# EAGLE board mag_encoder_Rev3_single_sided_4-up (EAGLE 7.5.0)
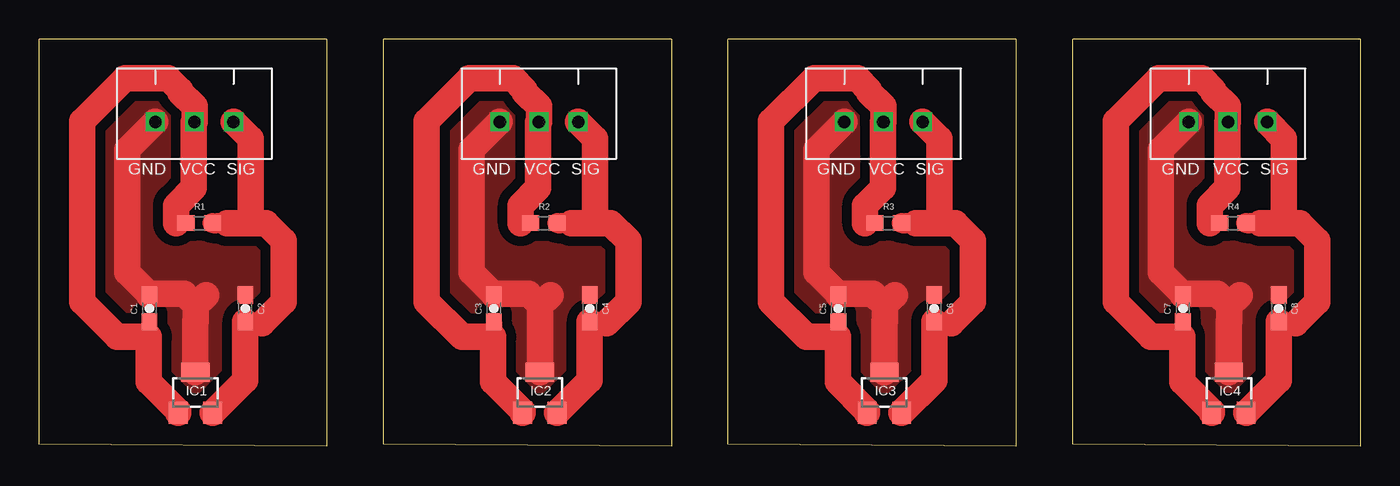
[diagram p0: board, top side]

Size 84.38 x 26 mm. Coordinates in mm from the lower left corner, seen from the top.
Outline: 0,0.12 0,26 18.38,26 18.38,0 0,0.12
Outline: 22,0.12 22,26 40.38,26 40.38,0 22,0.12
Outline: 44,0.12 44,26 62.38,26 62.38,0 44,0.12
Outline: 66,0.12 66,26 84.38,26 84.38,0 66,0.12
Copper layers 1: Top 0.0356mm
Design rules "LawlorPCB": minimum track width 25mil, minimum drill 13mil, track to track 25mil, track to pad 25mil, pad to pad 10mil, via to via 10mil, smd to smd 10mil, copper to edge 15mil, drill to drill 15mil, minimum pad ring 7mil, minimum via ring 7mil, stop-mask expansion 3mil, vias tented up to drill 0mil, thermal gap 10mil

## Footprints (pad centres in the part's own frame; a part is rotated, then mirrored left to right if it is on the bottom)
0603-CAP = smd 1.1 x 1: 1 -0.85,0; 2 0.85,0
SOT23-W = smd 1.2 x 1.4: 1 -1.1,-1.3; 2 1.1,-1.3 | smd 1.8 x 1.2: 3 0,1.3
0603 = smd 1.1 x 1: 1 -0.85,0; 2 0.85,0
3_PIN_JST-XH = drill 0.8 square: P$1 2.45,3.4; P$2 4.95,3.4; P$3 7.45,3.4

## Placement (x,y rotation side)
C1  100nF  [0603-CAP]  7.04,8.81 90 top
C2  4.7nF  [0603-CAP]  13.16,8.81 90 top
C3  100nF  [0603-CAP]  29.04,8.81 90 top
C4  4.7nF  [0603-CAP]  35.16,8.81 90 top
C5  100nF  [0603-CAP]  51.04,8.81 90 top
C6  4.7nF  [0603-CAP]  57.16,8.81 90 top
C7  100nF  [0603-CAP]  73.04,8.81 90 top
C8  4.7nF  [0603-CAP]  79.16,8.81 90 top
IC1  A1203LH  [SOT23-W]  9.98,3.44 0 top
IC2  A1203LH  [SOT23-W]  31.98,3.44 0 top
IC3  A1203LH  [SOT23-W]  53.98,3.44 0 top
IC4  A1203LH  [SOT23-W]  75.98,3.44 0 top
R1  10k  [0603]  10.23,14.26 180 top
R2  10k  [0603]  32.23,14.26 180 top
R3  10k  [0603]  54.23,14.26 180 top
R4  10k  [0603]  76.23,14.26 180 top
U$1  3_PIN_JST-XH  [3_PIN_JST-XH]  14.87,24.12 180 top
U$2  3_PIN_JST-XH  [3_PIN_JST-XH]  36.87,24.12 180 top
U$3  3_PIN_JST-XH  [3_PIN_JST-XH]  58.87,24.12 180 top
U$4  3_PIN_JST-XH  [3_PIN_JST-XH]  80.87,24.12 180 top

## Library data of the parts
C1 C3 C5 C7 = SparkFun-Capacitors
C2 C4 C6 C8 = SparkFun-Capacitors; PROD_ID: CAP-11378
IC1-IC4 = allegro; MF: ALLEGRO MICROSYSTEMS, INC.; MPN: A1203LLHLT-T; OC_FARNELL: 1791384; OC_NEWARK: 31K6608
R1-R4 = SparkFun-Resistors; PROD_ID: RES-09570
U$1-U$4 = Clayton

## Nets
GND: C1.2 C2.2 IC1.3 U$1.P$3
GND1: C3.2 C4.2 IC2.3 U$2.P$3
GND2: C5.2 C6.2 IC3.3 U$3.P$3
GND3: C7.2 C8.2 IC4.3 U$4.P$3
SIG: C2.1 IC1.2 R1.1 U$1.P$1
SIG1: C4.1 IC2.2 R2.1 U$2.P$1
SIG2: C6.1 IC3.2 R3.1 U$3.P$1
SIG3: C8.1 IC4.2 R4.1 U$4.P$1
VCC: C1.1 IC1.1 R1.2 U$1.P$2
VCC1: C3.1 IC2.1 R2.2 U$2.P$2
VCC2: C5.1 IC3.1 R3.2 U$3.P$2
VCC3: C7.1 IC4.1 R4.2 U$4.P$2

## Tracks (layer width: path | path; a pad name or v marks a point on that pad's centre or on a via)
GND
  Top 1.676: IC1.3 9.98,7.98 10,8 10,9 | 10,9 9.25,9.75 7.13,9.75 | 7.13,9.75 C1.2 | 10.66,9.66 10,9 | 7.13,9.75 7,9.75 5.62,11.12 5.62,18.93 U$1.P$3
  pour Top (no thermals): -0.88,29.5 20.25,29.5 20.25,-1.12 -0.5,-1.12
GND1
  Top 1.676: IC2.3 31.98,7.98 32,8 32,9 | 32,9 31.25,9.75 29.13,9.75 | 29.13,9.75 C3.2 | 32.66,9.66 32,9 | 29.13,9.75 29,9.75 27.62,11.12 27.62,18.93 U$2.P$3
  pour Top (no thermals): 21.12,29.5 42.25,29.5 42.25,-1.12 21.5,-1.12
GND2
  Top 1.676: IC3.3 53.98,7.98 54,8 54,9 | 54,9 53.25,9.75 51.13,9.75 | 51.13,9.75 C5.2 | 54.66,9.66 54,9 | 51.13,9.75 51,9.75 49.62,11.12 49.62,18.93 U$3.P$3
  pour Top (no thermals): 43.12,29.5 64.25,29.5 64.25,-1.12 43.5,-1.12
GND3
  Top 1.676: IC4.3 75.98,7.98 76,8 76,9 | 76,9 75.25,9.75 73.13,9.75 | 73.13,9.75 C7.2 | 76.67,9.66 76,9 | 73.13,9.75 73,9.75 71.62,11.12 71.62,18.93 U$4.P$3
  pour Top (no thermals): 65.12,29.5 86.25,29.5 86.25,-1.12 65.5,-1.12
SIG
  Top 1.016: 12,14.25 11.99,14.26 R1.1 | C2.1 13.25,7.88 14.25,7.88
  Top 1.27: R1.1 11.37,14.26 11.38,14.25
  Top 1.676: IC1.2 13.16,4.22 C2.1 | U$1.P$1 13.5,19.64 13.5,14.62 13.12,14.25 | 13.12,14.25 12,14.25 | 14.25,7.88 15.62,9.25 15.62,13.12 14.5,14.25 13.12,14.25
SIG1
  Top 1.016: 34,14.25 33.99,14.26 R2.1 | C4.1 35.25,7.88 36.25,7.88
  Top 1.27: R2.1 33.37,14.26 33.38,14.25
  Top 1.676: IC2.2 35.16,4.22 C4.1 | U$2.P$1 35.5,19.64 35.5,14.62 35.12,14.25 | 35.12,14.25 34,14.25 | 36.25,7.88 37.62,9.25 37.62,13.12 36.5,14.25 35.12,14.25
SIG2
  Top 1.016: 56,14.25 55.99,14.26 R3.1 | C6.1 57.25,7.88 58.25,7.88
  Top 1.27: R3.1 55.37,14.26 55.38,14.25
  Top 1.676: IC3.2 57.16,4.22 C6.1 | U$3.P$1 57.5,19.64 57.5,14.62 57.12,14.25 | 57.12,14.25 56,14.25 | 58.25,7.88 59.62,9.25 59.62,13.12 58.5,14.25 57.12,14.25
SIG3
  Top 1.016: 78,14.25 78,14.26 R4.1 | C8.1 79.25,7.88 80.25,7.88
  Top 1.27: R4.1 77.37,14.26 77.38,14.25
  Top 1.676: IC4.2 79.16,4.22 C8.1 | U$4.P$1 79.5,19.64 79.5,14.62 79.12,14.25 | 79.12,14.25 78,14.25 | 80.25,7.88 81.62,9.25 81.62,13.12 80.5,14.25 79.12,14.25
VCC
  Top 1.016: C1.1 7.04,7.04 7,7 | R1.2 8.75,14.25
  Top 1.676: 8.75,14.25 8.75,15.38 9.88,16.5 9.88,20.68 U$1.P$2 9.92,21.71 9,22.62 9,22.75 8.25,23.5 5.5,23.5 2.75,20.75 2.75,9.25 5,7 7,7 7,4.12 8.88,2.25 IC1.1
VCC1
  Top 1.016: C3.1 29.04,7.04 29,7 | R2.2 30.75,14.25
  Top 1.676: 30.75,14.25 30.75,15.38 31.88,16.5 31.88,20.68 U$2.P$2 31.92,21.71 31,22.62 31,22.75 30.25,23.5 27.5,23.5 24.75,20.75 24.75,9.25 27,7 29,7 29,4.12 30.88,2.25 IC2.1
VCC2
  Top 1.016: C5.1 51.04,7.04 51,7 | R3.2 52.75,14.25
  Top 1.676: 52.75,14.25 52.75,15.38 53.88,16.5 53.88,20.68 U$3.P$2 53.92,21.71 53,22.62 53,22.75 52.25,23.5 49.5,23.5 46.75,20.75 46.75,9.25 49,7 51,7 51,4.12 52.88,2.25 IC3.1
VCC3
  Top 1.016: C7.1 73.04,7.04 73,7 | R4.2 74.75,14.25
  Top 1.676: 74.75,14.25 74.75,15.38 75.88,16.5 75.88,20.68 U$4.P$2 75.92,21.71 75,22.62 75,22.75 74.25,23.5 71.5,23.5 68.75,20.75 68.75,9.25 71,7 73,7 73,4.12 74.88,2.25 IC4.1

## Text on the board
tNames: GND | VCC | SIG | GND | VCC | SIG | GND | VCC | SIG | GND | VCC | SIG
bNames: Magnetic Encoder Rev3 | Magnetic Encoder Rev3 | Magnetic Encoder Rev3 | Magnetic Encoder Rev3